# EAGLE board isolated-power (EAGLE 9.4.2)
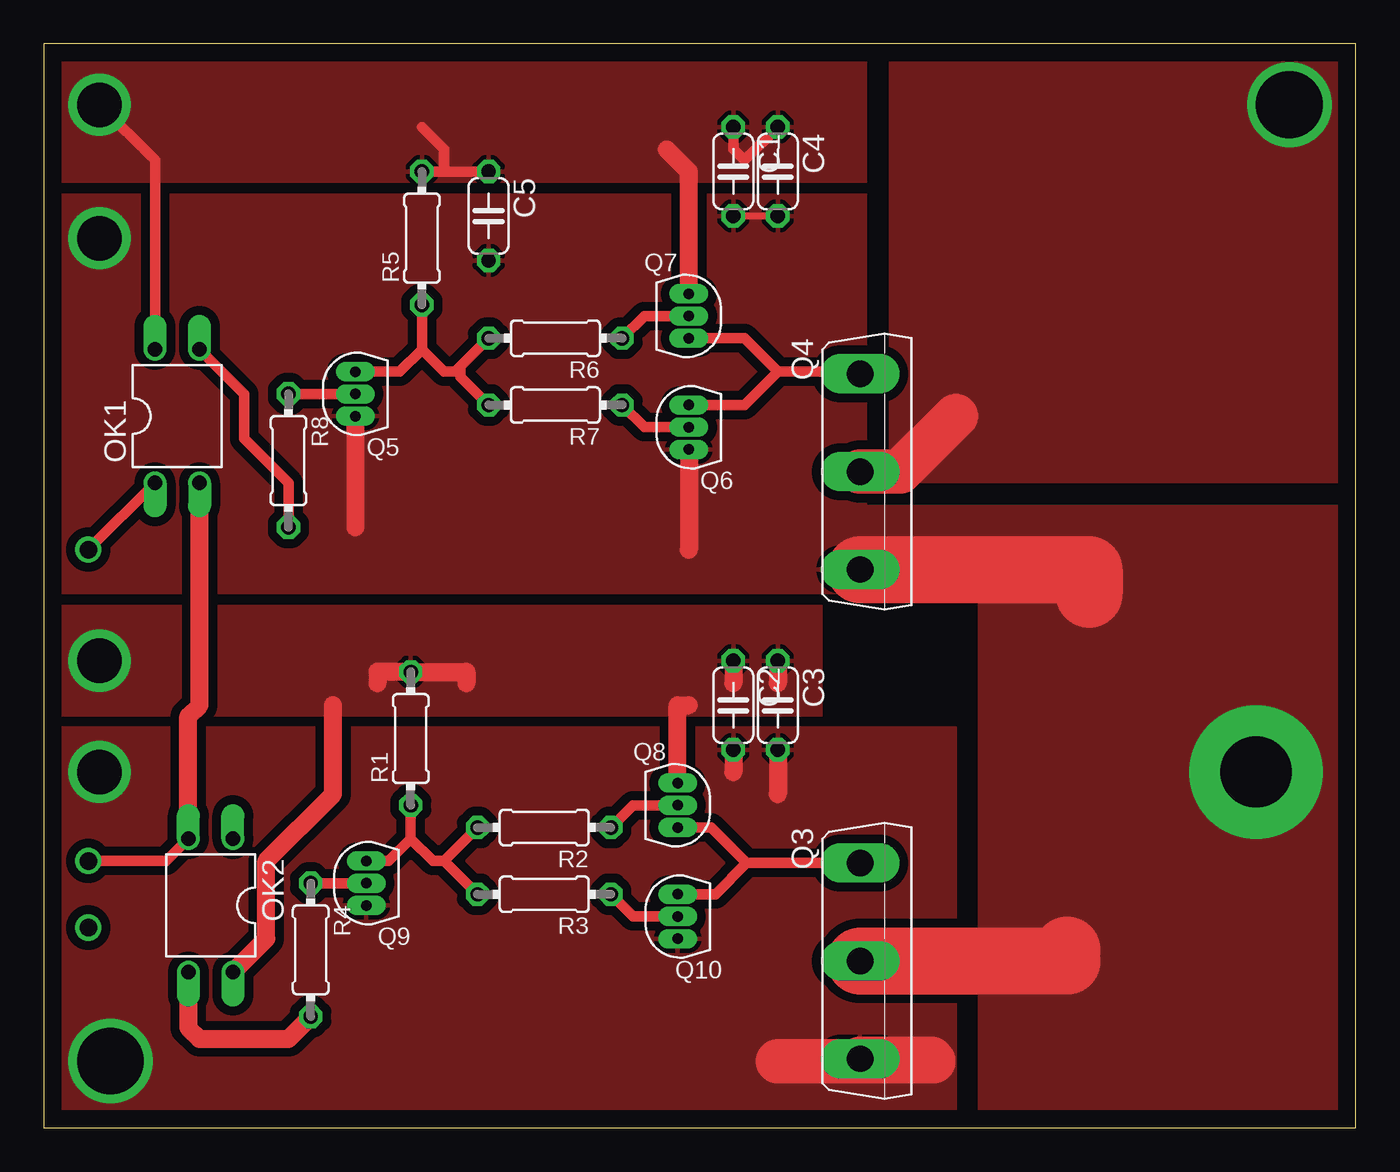
[diagram p0: board, top side]
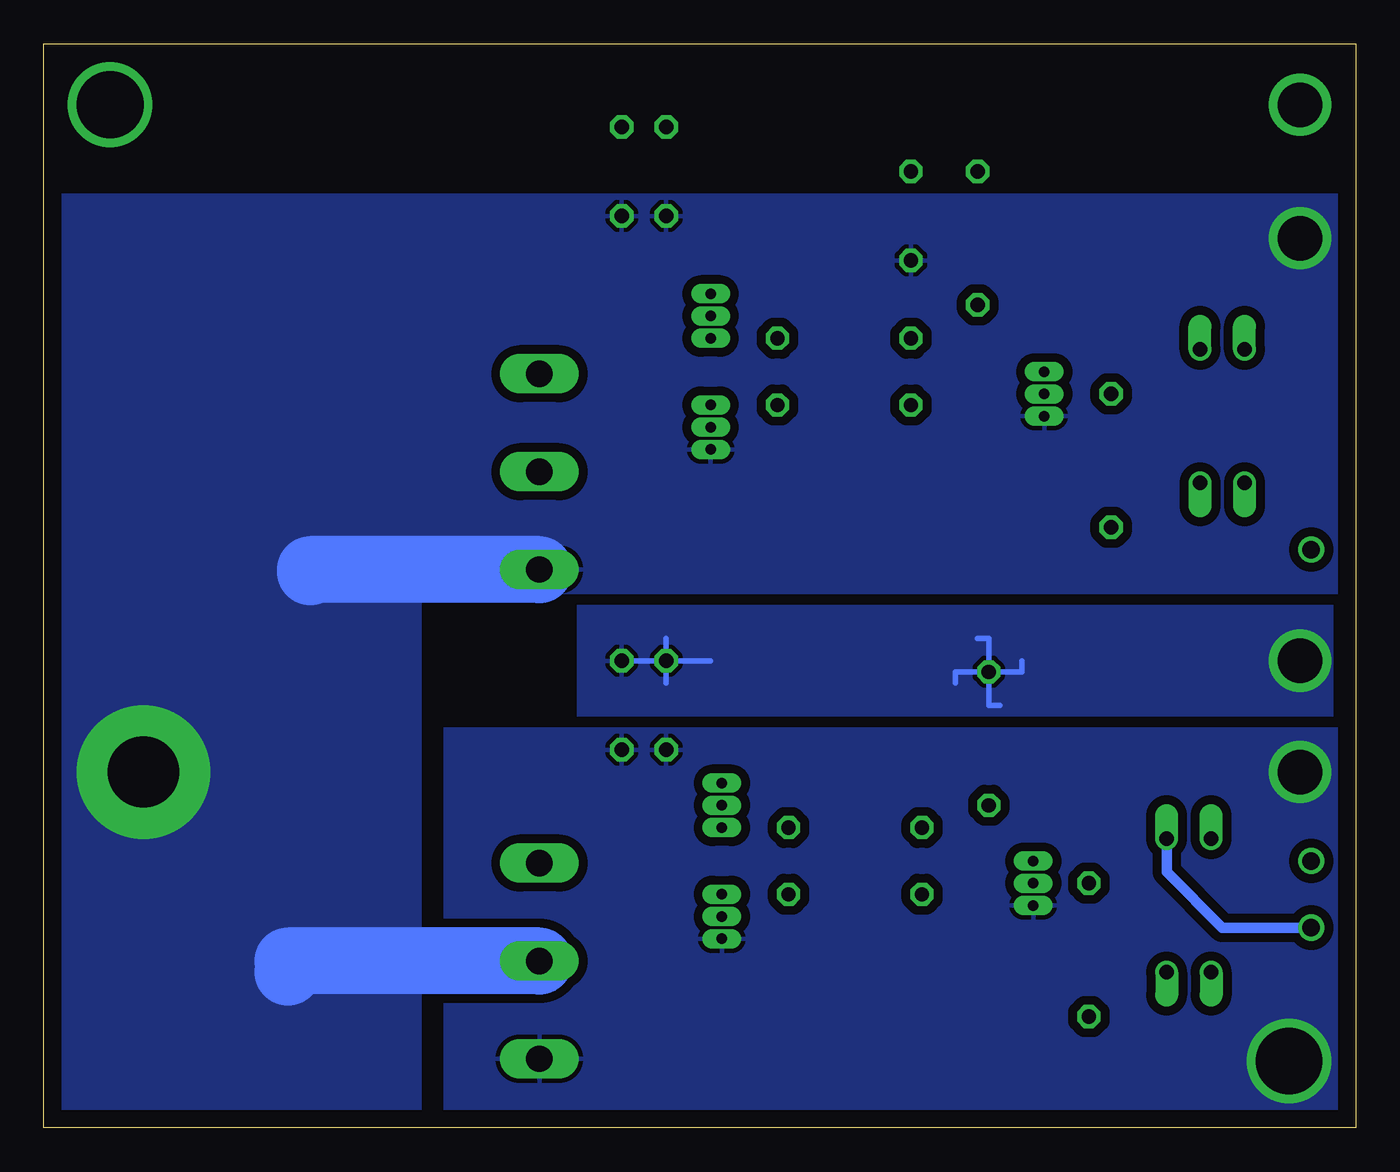
[diagram p1: board, bottom side, seen from below]

Size 74.91 x 61.9 mm. Coordinates in mm from the lower left corner, seen from the top.
Outline: 0,0 74.91,0 74.91,61.9 0,61.9 0,0
Copper layers (1*16): Top 0.035mm / dielectric 1.5mm / Bottom 0.035mm
Design rules "default": minimum track width 6mil, minimum drill 0.35mm, track to track 6mil, track to pad 6mil, pad to pad 6mil, via to via 6mil, smd to smd 6mil, copper to edge 40mil, drill to drill 6mil, minimum pad ring 10mil, minimum via ring 8mil, stop-mask expansion 4mil, vias tented up to drill 0mil, thermal gap 10mil

## Footprints (pad centres in the part's own frame; a part is rotated, then mirrored left to right if it is on the bottom)
C050-024X044 = drill 0.813 octagon: 1 -2.54,0; 2 2.54,0
DIL04 = drill 0.813 offset: 1 -1.27,-3.81; 2 1.27,-3.81; 3 1.27,3.81; 4 -1.27,3.81
TO247BV = drill 1.499 long: D 0,-2.921; G -5.588,-2.921; S 5.588,-2.921
TO-92 = drill 0.6 pad 0.813 long: B 0,0; C 0,-1.27; E 0,1.27
0204/7 = drill 0.813 octagon: 1 -3.81,0; 2 3.81,0

## Placement (x,y rotation side)
C1  0.1u  [C050-024X044]  39.37,54.61 270 top
C2  0.1u  [C050-024X044]  39.37,24.13 270 top
C3  1u  [C050-024X044]  41.91,24.13 270 top
C4  1u  [C050-024X044]  41.91,54.61 270 top
C5  [C050-024X044]  25.4,52.07 270 top
OK1  LTV816  [DIL04]  7.62,40.64 0 top
OK2  LTV816  [DIL04]  9.53,12.7 180 top
Q3  IRFPC40  [TO247BV]  49.53,9.53 270 top
Q4  IRFPC40  [TO247BV]  49.53,37.47 270 top
Q5  2N3904  [TO-92]  17.78,41.91 180 top
Q6  2N3904  [TO-92]  36.83,40.01 180 top
Q7  2N3906  [TO-92]  36.83,46.35 0 top
Q8  2N3906  [TO-92]  36.2,18.41 0 top
Q9  2N3904  [TO-92]  18.41,13.97 180 top
Q10  2N3904  [TO-92]  36.2,12.06 180 top
R1  1k  [0204/7]  20.95,22.23 90 top
R2  [0204/7]  28.57,17.14 180 top
R3  [0204/7]  28.57,13.34 180 top
R4  [0204/7]  15.24,10.16 270 top
R5  500r  [0204/7]  21.59,50.8 90 top
R6  500r  [0204/7]  29.21,45.09 180 top
R7  500r  [0204/7]  29.21,41.27 180 top
R8  1k  [0204/7]  13.97,38.1 270 top

## Library data of the parts
C1-C5 = rcl; SPICEPREFIX: C
OK1 OK2 = optocoupler; OC_FARNELL: unknown; OC_NEWARK: unknown
Q3 Q4 = transistor-power
Q5-Q10 = transistors
R1-R8 = rcl; SPICEPREFIX: R

## Nets
12V-HIGH: C1.1 C4.1 C5.1 OK1.4 Q7.E R5.2
12V-LOW: C2.1 C3.1 OK2.4 Q8.E R1.2
GND: C2.2 C3.2 Q3.S Q9.E Q10.E
GND1: OK1.2 OK2.2
MOTOR_OUT: C1.2 C4.2 C5.2 Q3.D Q4.S Q5.E Q6.E
N$1: Q3.G Q8.C Q10.C
N$2: Q9.C R1.1 R2.2 R3.2
N$3: OK1.3 R8.2
N$4: Q8.B R2.1
N$5: Q10.B R3.1
N$6: Q9.B R4.1
N$7: Q4.G Q6.C Q7.C
N$8: Q5.C R5.1 R6.2 R7.2
N$9: OK2.3 R4.2
N$10: Q7.B R6.1
N$11: Q6.B R7.1
N$12: Q5.B R8.1
N$13: OK2.1
N$14: OK1.1
V+: Q4.D

## Tracks (layer width: path | path; a pad name or v marks a point on that pad's centre or on a via)
12V-HIGH  (via drill 2.54)
  Top 0.61: C4.1 40.01,55.24 39.37,55.88 C1.1 | Q7.E 36.83,52.07 | C5.1 22.86,54.61 | 22.86,54.61 R5.2 | 21.59,57.15 22.86,55.88 22.86,54.61 | OK1.4 6.35,55.24 v3.17,58.42
  Top 1.016: Q7.E 36.83,54.61 35.56,55.88
  pour Top (isolate 0.508): 0,63.5 46.99,63.5 46.99,53.98 0,53.98
12V-LOW  (via drill 2.54)
  Top 0.61: Q8.E 36.2,20.95
  Top 1.016: Q8.E 36.2,24.13 36.83,24.13 | 24.13,25.4 24.13,26.04 R1.2 19.05,26.04 19.05,25.4 | C3.1 41.91,25.4 | C2.1 39.37,25.4 | OK2.4 12.7,10.79 12.7,15.24 16.51,19.05 16.51,24.13
  Bottom 0.305: R1.2 22.86,26.04 22.86,25.4 | R1.2 19.05,26.04 19.05,26.67 | C2.1 36.83,26.67 | C3.1 C2.1 | 39.37,27.94 C2.1 | C2.1 39.37,25.4 | R1.2 20.95,27.94 21.59,27.94 | R1.2 20.95,24.13 20.32,24.13
  other vias: 3.17,26.67
  pour Top (isolate 0.508): -1.27,29.84 44.45,29.84 44.45,23.5 -1.27,23.5
  pour Bottom (isolate 0.508): 1.27,29.84 44.45,29.84 44.45,23.5 1.27,23.5
GND  (via drill 2.54, 3.81)
  Top 1.016: C2.2 39.37,20.32 | C3.2 41.91,19.05
  Top 2.54: Q3.S 50.67,3.94 50.8,3.81 46.74,3.81 Q3.S | Q3.S 46.48,3.81 41.91,3.81
  other vias: 3.17,20.32 3.81,3.81
  pour Top (isolate 0.508): -1.27,-1.27 52.07,-1.27 52.07,22.86 -1.27,22.86
  pour Bottom (isolate 0.508): -3.81,-2.54 52.07,-2.54 52.07,22.86 -3.81,22.86
GND1  (via drill 1)
  Top 0.61: OK2.2 6.98,15.24 v2.54,15.24
  Top 1.016: OK1.2 8.89,24.13 8.26,23.5 OK2.2
MOTOR_OUT  (via drill 2.54, 4.06 pad 7.62)
  Top 0.406: Q6.E 36.83,34.92 | Q5.E 17.78,34.92 | C4.2 C1.2
  Top 0.61: Q6.E 36.83,34.29
  Top 1.016: Q5.E 17.78,34.29 | Q6.E 36.83,33.02
  Top 3.81: Q3.D 58.42,9.53 58.42,10.16 | Q4.S 59.69,31.88 59.69,30.48
  Bottom 3.81: Q3.D 60.96,9.53 60.96,8.89 | Q4.S 59.69,31.88 59.69,31.75
  other vias: 69.22,20.32 3.17,50.8
  pour Bottom (isolate 0.508): 53.34,-1.27 53.34,30.48 -2.54,30.48 -2.54,53.34 76.2,53.34 76.2,-1.27
  pour Top (isolate 0.508): 76.2,-2.54 76.2,35.56 46.99,35.56 46.99,53.34 0,53.34 0,30.48 53.34,30.48 53.34,-2.54
N$1
  Top 0.61: Q10.C 38.35,13.34 40.13,15.11 | Q8.C 38.1,17.14 40.13,15.11 | 40.13,15.11 Q3.G
N$2
  Top 0.61: Q9.C 19.68,15.24 20.95,16.51 | R1.1 20.95,16.51 | 20.95,16.51 22.22,15.24 22.86,15.24 | R2.2 22.86,15.24 | R3.2 22.86,15.24
N$3
  Top 0.61: OK1.3 11.43,41.91 11.43,39.37 13.97,36.83 R8.2
N$4
  Top 0.61: R2.1 33.66,18.41 Q8.B
N$5
  Top 0.61: R3.1 33.66,12.06 Q10.B
N$6
  Top 0.61: R4.1 Q9.B
N$7
  Top 0.61: Q6.C 40.01,41.27 41.91,43.18 | Q4.G 46.48,43.18 41.91,43.18 | Q7.C 40.01,45.09 41.91,43.18
N$8
  Top 0.406: R7.2 23.49,43.18
  Top 0.61: Q5.C 20.32,43.18 21.59,44.45 | R5.1 21.59,44.45 | 21.59,44.45 22.86,43.18 23.49,43.18 23.81,43.5 | R6.2 23.81,43.5 | 23.81,43.5 23.81,42.86 R7.2
N$9
  Top 1.016: OK2.3 8.26,5.71 8.89,5.08 13.97,5.08 R4.2
N$10
  Top 0.61: Q7.B 34.29,46.35 R6.1
N$11
  Top 0.61: Q6.B 34.29,40.01 R7.1
N$12
  Top 0.61: R8.1 Q5.B
N$13  (via drill 1)
  Bottom 0.61: OK2.1 10.79,14.61 7.62,11.43 v2.54,11.43
N$14  (via drill 1)
  Top 0.61: OK1.1 v2.54,33.02
V+  (via drill 3.81)
  Top 2.54: Q4.D 48.9,37.47 52.07,40.64
  other vias: 71.12,58.42
  pour Top (isolate 0.508): 48.26,62.23 74.93,62.23 74.93,36.83 48.26,36.83